# Altium PCB IR_recieverUC3M.PcbDoc
Units mm, origin at the board's own origin, x right, y up, seen from the top; angles counter-clockwise.
Board outline 16.8 x 15.6 mm, 2 copper layers (Top Layer, Bottom Layer); 37 components, 21 nets, 99 pads, 14 vias.
Unrouted connection lines stored in the file: 2.
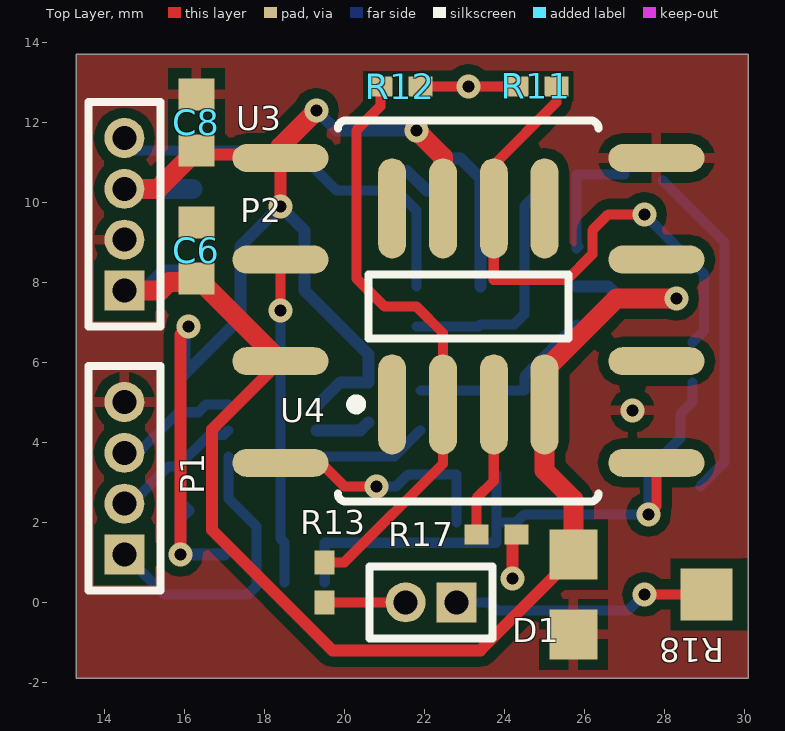
[diagram p0: Top Layer view]
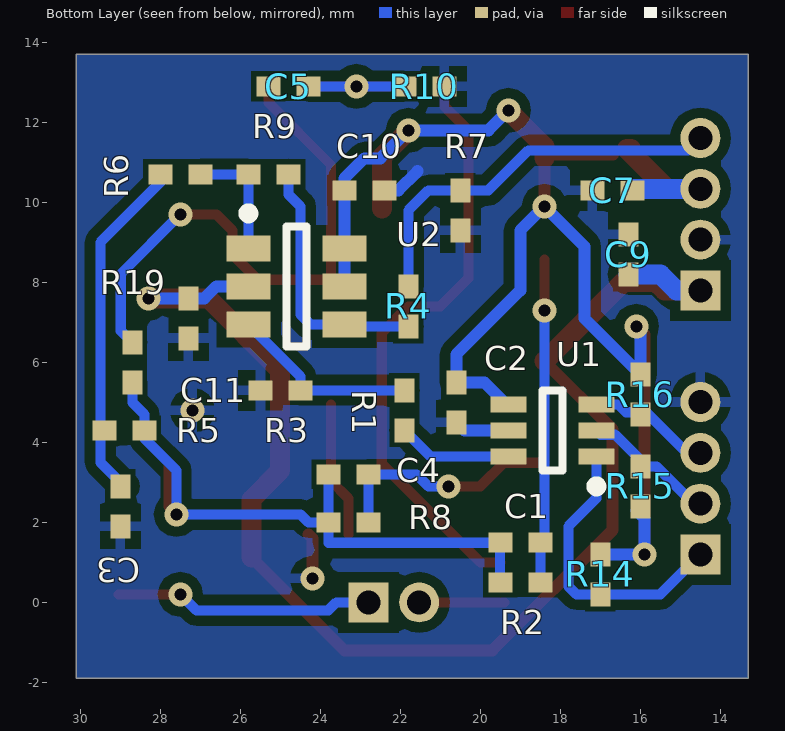
[diagram p1: Bottom Layer view, seen from below]

## Layer stack, top to bottom
Top Solder: solder mask 0.0102, Solder Resist, Dk 3.5
Top Layer: signal copper 0.0356
Dielectric1: dielectric 0.32, FR-4, Dk 4.8
Bottom Layer: signal copper 0.0356
Bottom Solder: solder mask 0.0102, Solder Resist, Dk 3.5

## Board outline
13.3,-1.9 13.3,13.7 30.1,13.7 30.1,-1.9

## Design rules (kind name [scope] priority, off if disabled: settings)
Clearance Clearance_1 [(HasFootprint('0402')OR InComponent('U1'))] p1: gap=0.127
Clearance [All] p2: gap=0.254
ComponentClearance ComponentClearance_1 [InComponent('U4') vs InComponent('U3')] p1: gap=0 collisioncheckmode=3 verticalgap=0 showdistances=FALSE
ComponentClearance [All] p2: gap=0.254 collisioncheckmode=3 verticalgap=0.254 showdistances=FALSE
HoleSize [All] p1: absolutevalues=TRUE maxlimit=3.5 minlimit=0.025 maxpercent=80.000 minpercent=20.000
MinimumSolderMaskSliver MinimumSolderMaskSliver_1 [InComponent('U1')] p1: minsoldermaskwidth=0.05
MinimumSolderMaskSliver [All] p2: minsoldermaskwidth=0.254
PolygonConnect [All] p1: connectstyle=Relief reliefconductorwidth=0.254 reliefentries=4 polygonreliefangle="90 Angle" airgapwidth=0.254
RoutingVias [All] p1: holewidth=0.35 width=0.7 viastyle="Through Hole" minholewidth=0.3 minwidth=0.5 maxholewidth=0.711 maxwidth=1.27
SilkToSolderMaskClearance SilkscreenOverComponentPads_1 [All vs (HasFootprint('J1-0603')   OR HasFootprint('POT4MM-2'))] p1: minsilkscreentomaskgap=0.02 clearancetoexposedcopper=TRUE
SilkToSolderMaskClearance SilkscreenOverComponentPads [IsPad] p2: minsilkscreentomaskgap=0.254 clearancetoexposedcopper=TRUE
SolderMaskExpansion SolderMaskExpansion_1 [InComponent('U1')] p1: expansion=0.05
SolderMaskExpansion [All] p2: expansion=0.102
Width Width_1 [(InNet('-3V') OR InNet('+3V') OR InNet('GND'))] p1: maxlimit=1 minlimit=0.3 preferedwidth=0.5 minimp=50.000000 maximp=50.000000 favimp=50.000000
Width [All] p2: maxlimit=0.254 minlimit=0.254 preferedwidth=0.254
26 further rules are at their usual default settings.

## Components (designator, comment, footprint, x,y, rotation, side; value= is the part's Value field where it differs from the comment)
C1 "Cap" 0402 19,1.5 r0 bottom
C2 "Cap" 0402 20.6,5 r90 bottom
C3 "Cap" 0402 29,2.4 r90 bottom
C4 "Cap" 0402 23.3,3.2 r180 bottom
C5 "Cap" 0402 24.8,12.9 r0 bottom
C6 "Cap Pol" 1608[0603] 16.3,8.8 r90 top
C7 "Cap" 0402 16.7,10.3 r180 bottom
C8 "Cap Pol" 1608[0603] 16.3,12 r270 top
C9 "Cap" 0402 16.3,8.7 r270 bottom
C10 "Cap" 0402 22.9,10.3 r0 bottom
C11 "Cap" 0402 27.3,7.1 r90 bottom
D1 "Header 2" MHDR1X2 22.8,0 r180 top
P1 "Header 4" MHDR1X4 14.5,1.2 r90 top
P2 "Header 4" MHDR1X4 14.5,7.8 r90 top
R1 "Res3" 0402 21.9,4.8 r90 bottom
R2 "Res3" 0402 19,0.5 r0 bottom
R3 "Res3" 0402 25,5.3 r180 bottom
R4 "Res3" 0402 21.8,7.4 r90 bottom
R5 "Res3" 0402 28.9,4.3 r0 bottom
R6 "Res3" 0402 27.5,10.7 r180 bottom
R7 "Res3" 0402 20.5,9.8 r90 bottom
R8 "Res3" 0402 23.3,2 r180 bottom
R9 "Res3" 0402 25.3,10.7 r180 bottom
R10 "Res3" 0402 21.4,12.9 r0 bottom
R11 "Res3" 0402 24.8,12.9 r0 top
R12 "Res3" 0402 21.4,12.9 r0 top
R13 "Res3" 0402 19.5,0.5 r90 top
R14 "Res3" 0402 17,0.7 r90 bottom
R15 "Res3" 0402 16,2.9 r270 bottom
R16 "Res3" 0402 16,5.2 r90 bottom
R17 "Res3" 0402 23.8,1.7 r180 top
R18 "RPot SM" POT-3MM-SMD 27.6,0.2 r0 top
R19 "Res3" 0402 28.7,6 r90 bottom
U1 "DAC7311IDCKR" TI-DCK6_V 18.2,4.3 r0 bottom
U2 "LMV761MF/NOPB" MF06A_N 24.6,7.9 r180 bottom
U3 "OPT101P-J" DTL0008A_M 23.1,7.3 r0 top
U4 "THS4061CD" TI-D8_M 23.1,7.4 r90 top

## Footprints (in the part's own frame and the unit in brackets; to place one, negate y for a bottom-side part, rotate by r counter-clockwise, add the part's x,y. Pads: shape width x height; smd on the part's side, far side on the other; paste and mask are expansions set on the pad)
0402 [mm] "Chip Capacitor, Body 1.0x0.5mm, IPC High Density"
  rect 0.6x0.5 smd: 1(-0.5,0) 2(0.5,0)
  body extent -0.55,-0.3 0.55,0.3, height 1.3
1608[0603] [mm] "Chip Capacitor, Body 1.6x0.8mm, IPC High Density"
  rect 0.8x0.9 smd: 1(-0.7,0) 2(0.7,0)
  body extent -0.87,-0.48 0.87,0.48, height 1.3
DTL0008A_M [mm]
  oval 2.4x0.7 smd paste+0 mask+0.051: 1(-4.7,3.81) 2(-4.7,1.27) 3(-4.7,-1.27) 4(-4.7,-3.81) 5(4.7,-3.81) 6(4.7,-1.27) 7(4.7,1.27) 8(4.7,3.81)
  silkscreen extent -3.26,-4.78 3.25,4.75
MF06A_N [mm] "SOT23, 6-Leads, Body 2.9x1.6mm, Pitch 0.95mm, Lead Span 2.8mm, IPC Medium Density"
  rect 1.1x0.65 smd: 1(-1.2,0.95) 2(-1.2,0) 3(-1.2,-0.95) 4(1.2,-0.95) 5(1.2,0) 6(1.2,0.95)
  silkscreen extent -1.33,-1.5 0.25,1.95, body extent -0.83,-1.49 0.83,1.5, height 1.22
MHDR1X2 [mm] "Connector; Header; 2 Position"
  rect 1x1 hole 0.6: 1(0,0)
  round 1 hole 0.6: 2(1.27,0)
  silkscreen extent -0.9,-0.9 2.17,0.9
MHDR1X4 [mm] "Connector; Header; 4 Position"
  rect 1x1 hole 0.6: 1(0,0)
  round 1 hole 0.6: 2(1.27,0) 3(2.54,0) 4(3.81,0)
  silkscreen extent -0.9,-0.9 4.71,0.9
POT-3MM-SMD [mm] "Square Trimming Potentiometer"
  rect 1.2x1.25 smd: CCW(-1.875,-1) CW(-1.875,1)
  rect 1.3x1.3 smd: W(1.45,0)
TI-D8_M [mm] "SOIC, 8-Leads, Body 4.9x3.9mm, Pitch 1.27mm, IPC Low Density"
  oval 2.5x0.7 smd: 1(-2.45,1.905) 2(-2.45,0.635) 3(-2.45,-0.635) 4(-2.45,-1.905) 5(2.45,-1.905) 6(2.45,-0.635) 7(2.45,0.635) 8(2.45,1.905)
  silkscreen extent -2.57,-2.5 0.8,2.93, body extent -2,-2.5 2,2.5, height 1.75
TI-DCK6_V [mm] "SOT23, 6-Leads, Body 2x1.25mm, Pitch 0.65mm"
  rect 0.9x0.4 smd: 1(-1.1,0.65) 2(-1.1,0) 3(-1.1,-0.65) 4(1.1,-0.65) 5(1.1,0) 6(1.1,0.65)
  silkscreen extent -1.22,-1 0.25,1.52, body extent -0.63,-1 0.63,1, height 1.1

## Part data
C1 C2 C3 C4 C5 C7 C9 C10 C11: library part "Cap Semi", "Capacitor (Semiconductor SIM Model)"
C6 C8: library part "Cap Pol3", "Polarized Capacitor (Surface Mount)"
D1: "Header, 2-Pin"
P1 P2: "Header, 4-Pin"
R1 R2 R3 R4 R5 R6 R7 R8 R9 R10 R11 R12 R13 R14 R15 R16 R17 R19: "Resistor"
R18: "Square Trimming Potentiometer"
U1: library part CMP-0004-00359-1, "12-Bit, Single Channel, 80 uA, 1.8 to 5.5 V DAC in SC70 Package, -40 to 125 degC, 6-pin SOT23 (DCK6), Green (RoHS & no Sb/Br)"
U2: library part CMP-0055-01152-2, "Low Voltage, Precision Comparator with Push-Pull Output, 6-pin SOT-23, Pb-Free"
U3: "Imported"
U4: "180 MHz High Output Drive Voltage-Feedback Amplifier, 9 to 32 V, 0 to 70 degC, 8-pin SOIC (D8), Green (RoHS & no Sb/Br)"

## Via types
v1: diameter 0.6, hole 0.3, Top Layer to Bottom Layer, 14 vias

## Nets (pads, with @x,y where several pads share a name; then routed paths per layer and width w, separated by ;. In a path a pad name is that pad's centre, name@x,y a point inside that pad or via, vN(x,y) a via of type N, cw(c..) or ccw(c..) an arc to the next point about the centre after c; other vN are vias at no path point)
+3V: C2.2 C7.2 C8.2 C10.2 P2.3 R14.2 R15.2 R16.2 U1.4 U2.5 U2.6 U3.1 U4.7 | length 39.9
  Top Layer w0.3: v1(15.9,1.2) 15.9,6.7 v1(16.1,6.9) ; C8.2@16.69,11.2 18.4,11.2 v1(18.4,9.9)
  Top Layer w0.5: P2.3 15.34,10.34 16.34,11.34 C8.2@16.24,11.34 ; U3.1 18.4,11.4 v1(19.3,12.3) ; v1(21.8,11.8) 22.465,11.135 U4.7
  Bottom Layer w0.3: R15.2 16.1,2.3 15.9,2.1 v1(15.9,1.2) R14.2 ; v1(16.1,6.9) 16,6.8 R16.2 17.4,7.1 17.4,8.9 v1(18.4,9.9) 19,9.3 19,7.8 20.6,6.2 C2.2 19.9,5.5 U1.4@19.35,4.95 ; v1(19.3,12.3) 19.8,11.8 v1(21.8,11.8) 22.5,11.1 22.9,11.1 23.4,10.6 U2.6 U2.5
  Bottom Layer w0.5: P2.3@14.4,10.34 C7.2@16.2,10.34
-3V: C6.1 C9.2 C11.2 P2.1 R18.CW U2.2 U3.3 U4.4 | length 34.7
  Top Layer w0.3: U3.3 16.696,4.326 16.696,1.804 19.7,-1.2 23.4,-1.2 25.725,1.125 R18.CW
  Top Layer w0.5: P2.1 15.4,7.8 15.615,8.015 16.415,8.015 U3.3 ; R18.CW@25.725,1.125 25.725,2.575 25.005,3.295 U4.4 25.005,5.805 26.8,7.6 v1(28.3,7.6)
  Bottom Layer w0.3: U2.2 26.6,7.9 26.9,7.6 C11.2 v1(28.3,7.6)
  Bottom Layer w0.5: P2.1 15.1,7.8 15.5,8.2 C9.2
GND: C2.1 C3.1 C6.2 C7.1 C8.1 C9.1 C10.1 C11.1 P1.4 P2.2 R3.1 R7.1 R10.1 R17.1 R18.CCW U1.5 U3.8 | length 3.6
  Top Layer w0.3: v1(24.2,0.6) 24.2,1.6 R17.1
  Bottom Layer w0.3: U1.5 20.4,4.3 C2.1 ; 21.57,10.781 22.051,10.3 C10.1
  other v1: 27.2,4.8
NetC1_1: C1.1 R2.1 U3.2 | length 8.1
  Top Layer w0.254: v1(18.4,7.3) U3.2
  Bottom Layer w0.254: v1(18.4,7.3) 18.4,1.6 C1.1 R2.1
NetC1_2: C1.2 C4.1 R2.2 R5.1 R8.1 R19.1 U3.5 | length 16
  Top Layer w0.254: v1(27.6,2.2) 27.8,2.4 U3.5
  Bottom Layer w0.254: R2.2 19.508,0.508 19.508,1.492 23.792,1.492 23.8,1.5 R8.1 ; C4.1 R8.1 ; R19.1 28.7,5 28.4,4.7 R5.1 28.4,4.1 27.6,3.3 v1(27.6,2.2) 24.5,2.2 24.3,2 R8.1
NetC3_2: C3.2 R5.2 R6.1 | length 8.5
  Bottom Layer w0.254: R6.1@27.95,10.55 29.5,9 29.5,3.5 C3.2@28.9,2.9
NetC4_2: C4.2 R8.2 U3.4 | length 6
  Top Layer w0.254: U3.4 19.41,3.49 20,2.9 v1(20.8,2.9)
  Bottom Layer w0.254: v1(20.8,2.9) 21.3,2.9 21.6,3.2 C4.2 R8.2
NetC5_1: C5.1 R10.2 R11.1 R12.2 | length 4.8
  Top Layer w0.254: R12.2 R11.1
  Bottom Layer w0.254: R10.2 C5.1
  other v1: 23.1,12.9
NetC5_2: C5.2 R11.2 R19.2 U4.6 | length 14.2
  Top Layer w0.254: R11.2 25.3,12.5 23.735,10.935 U4.6 23.735,8.065 25.565,8.065 26.2,8.7 26.2,9.3 26.6,9.7 v1(27.5,9.7)
  Bottom Layer w0.254: v1(27.5,9.7) 28.992,8.208 28.992,6.792 R19.2
NetD1_1: D1.1 R18.W | length 6.8
  Top Layer w0.254: v1(27.5,0.2) R18.W
  Bottom Layer w0.254: D1.1@23,0.2 D1.1 23.6,0 23.8,-0.2 27.1,-0.2 v1(27.5,0.2)
NetD1_2: D1.2 R13.1 | length 2.1
  Top Layer w0.254: R13.1@19.4,0 D1.2
NetP1_1: P1.1 R14.1 U1.1 | length 7.5
  Bottom Layer w0.254: P1.1@14.7,1.2 P1.1 15.5,0.2 R14.1 17.6,0.2 17.8,0.4 17.8,1.9 17.1,2.6 U1.1
NetP1_2: P1.2 R15.1 U1.2 | length 3.4
  Bottom Layer w0.254: P1.2 14.67,2.47 15.6,3.4 15.841,3.4 16.633,4.192 16.992,4.192 U1.2
NetP1_3: P1.3 R16.1 U1.3 | length 3.1
  Bottom Layer w0.254: P1.3 14.84,3.74 15.854,4.754 16.354,4.754 16.55,4.95 U1.3
NetP2_4: P2.4 R4.2 R7.2 | length 9.9
  Bottom Layer w0.254: P2.4 14.81,11.3 18.8,11.3 19.8,10.3 21.3,10.3 21.8,9.8 R4.2
NetR1_1: R1.1 U1.6 | length 2.9
  Bottom Layer w0.254: U1.6 21.25,3.65 R1.1
NetR1_2: R1.2 R3.2 U2.3 | length 4.8
  Bottom Layer w0.254: R1.2 R3.2 24.5,5.65 U2.3
NetR4_1: R4.1 R9.2 U2.4 | length 6.4
  Bottom Layer w0.254: R4.1 23.35,6.9 U2.4 24.25,6.95 24.5,7.2 24.5,9.9 24.8,10.2 R9.2
NetR6_2: R6.2 R9.1 U2.1 | length 3.1
  Bottom Layer w0.254: U2.1@25.85,8.9 U2.1 R9.1 R6.2
NetR12_1: R12.1 R13.2 U4.2 | length 15
  Top Layer w0.254: R13.2 20,1 22.465,3.465 U4.2 22.465,6.735 21.8,7.4 21,7.4 20.3,8.1 20.3,11.8 20.9,12.4 R12.1
NetR17_2: R17.2 U4.3 | length 3.4
  Top Layer w0.254: R17.2 23.3,2.6 23.735,3.035 U4.3
pads on no net: U3.6 U3.7 U4.1 U4.5 U4.8

## Polygon pours and split planes (outlines as drawn)
GND on Top Layer "TopGnd" (solid, remove dead copper, pour order 0): 13.3,13.7 13.3,-1.9 30.1,-1.9 30.1,13.7
GND on Bottom Layer "BotGnd" (solid, remove dead copper, pour order 2): 13.3,13.7 13.3,-1.9 30.1,-1.9 30.1,13.7

## Silkscreen, mask and mechanical layers (free items; w line width, h text height)
Drill Drawing:
  the board outline again, w0.254